# Altium PCB Power15V0_0.3A_TrLess.PcbDoc
Units mm, origin at the board's own origin, x right, y up, seen from the top; angles counter-clockwise.
Board outline 59.5 x 24.6 mm, 2 copper layers (Top Layer, Bottom Layer); 22 components, 12 nets, 53 pads, 0 vias.
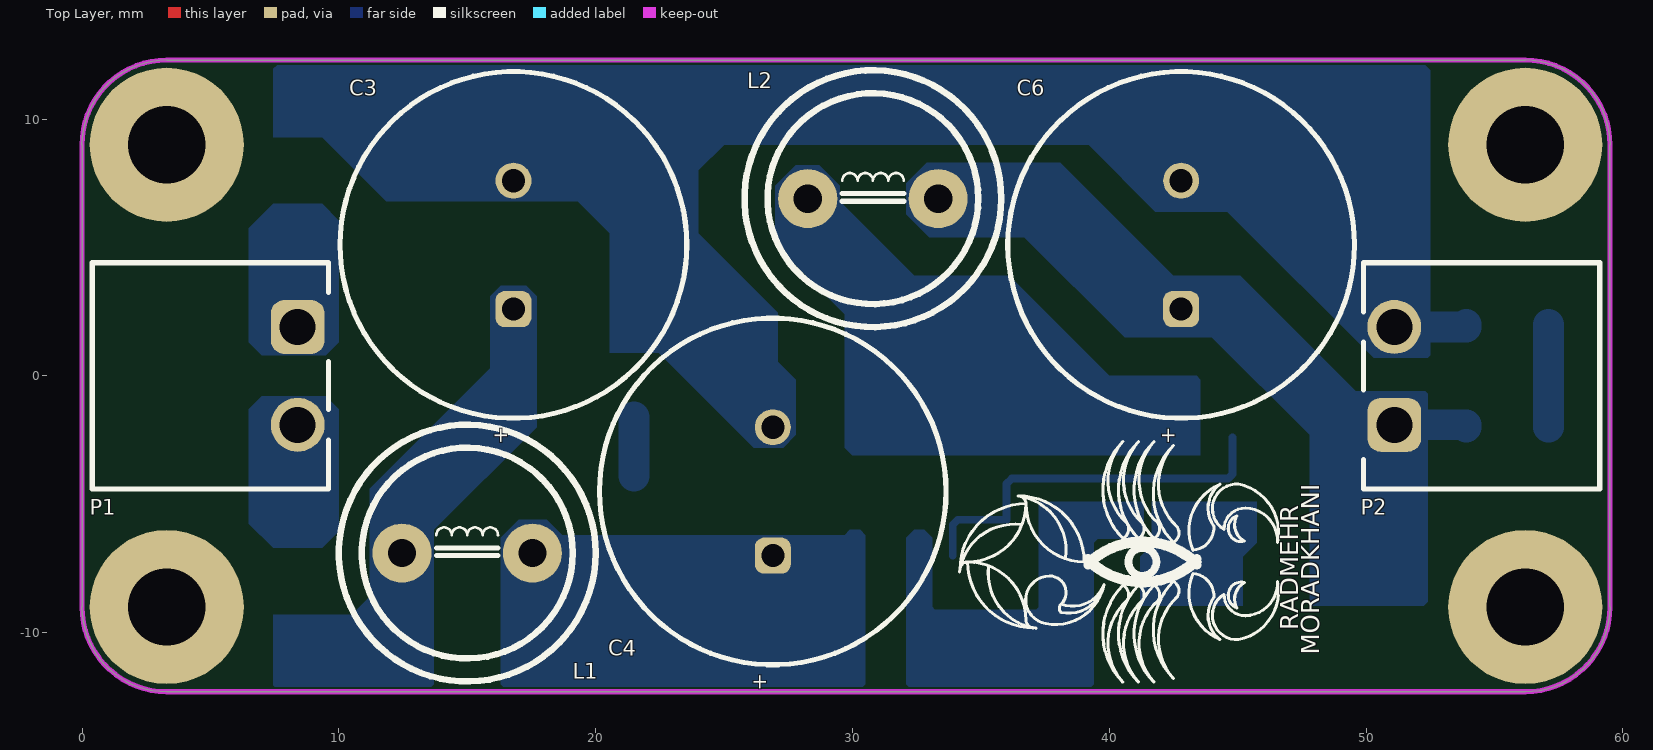
[diagram p0: Top Layer view]
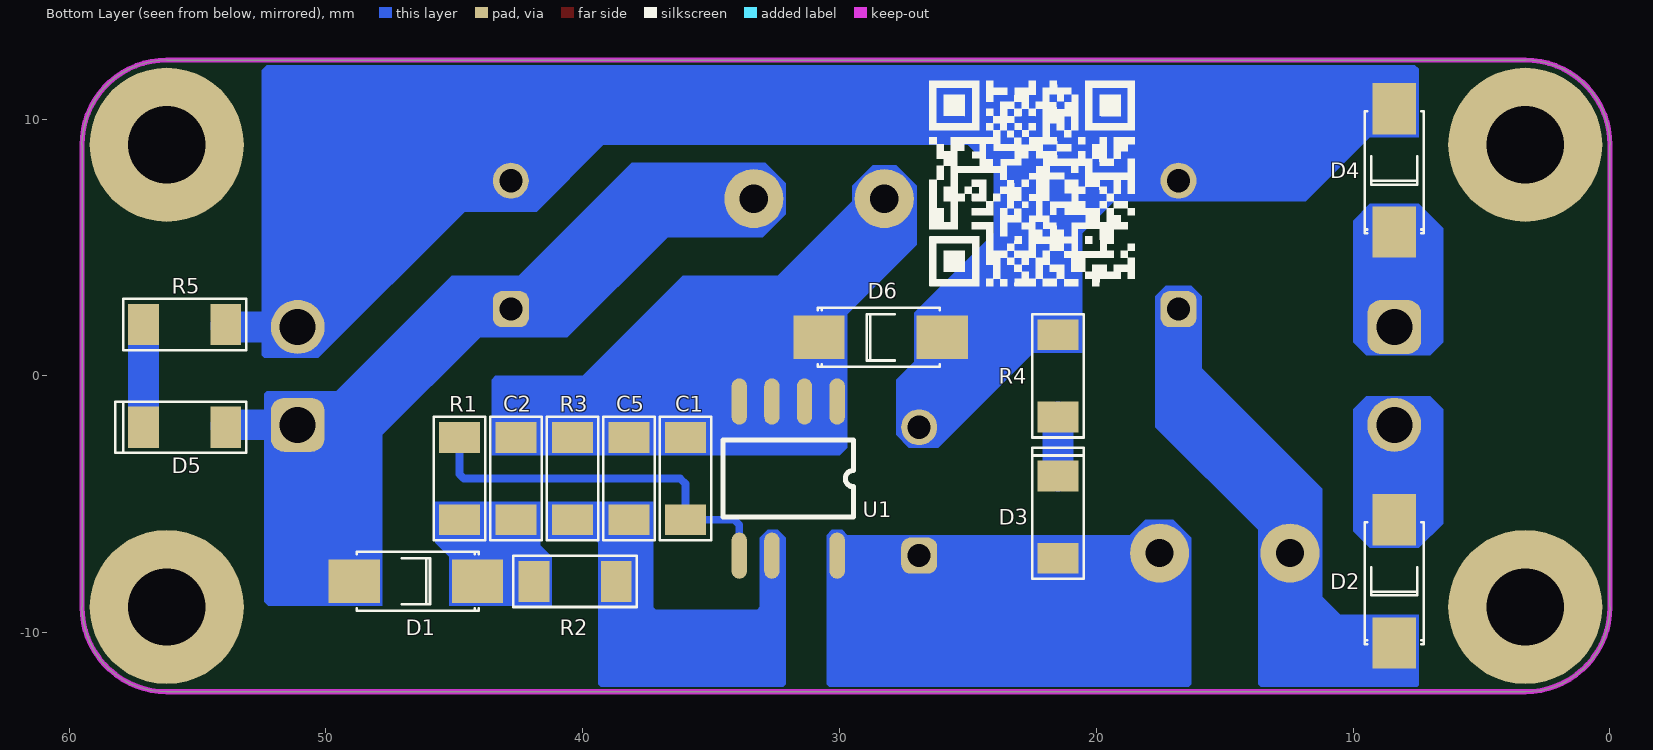
[diagram p1: Bottom Layer view, seen from below]
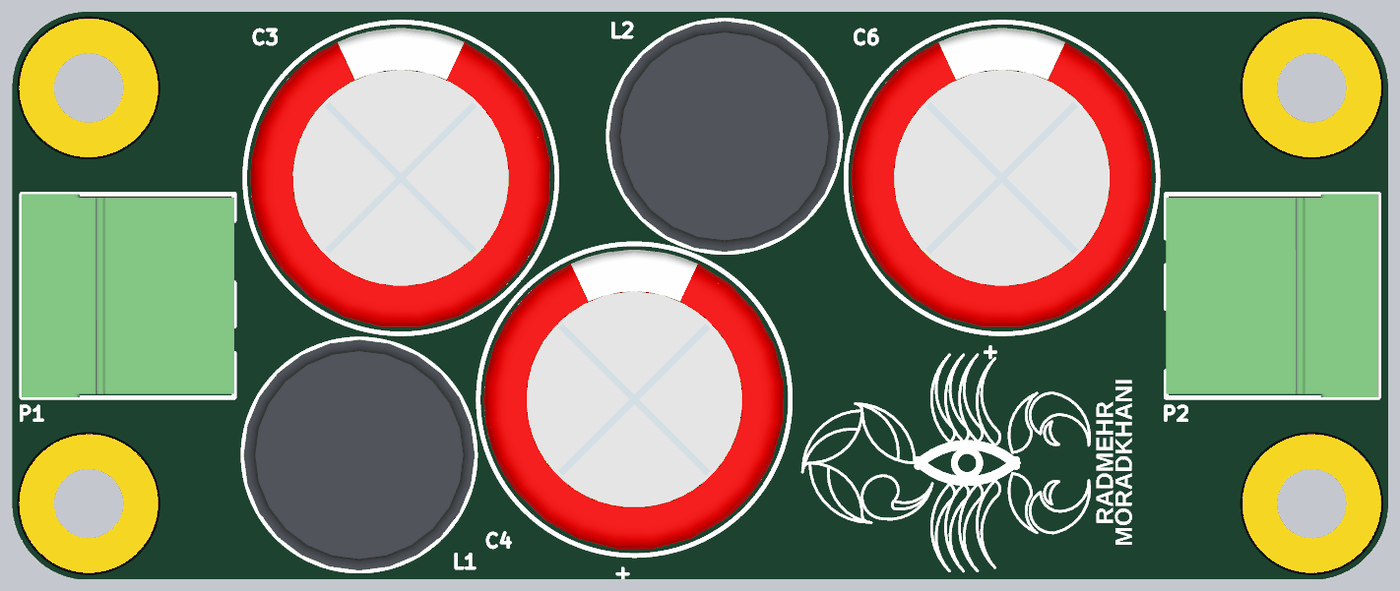
[diagram p2: 3D render of the assembled board from above, using the file's embedded part models]
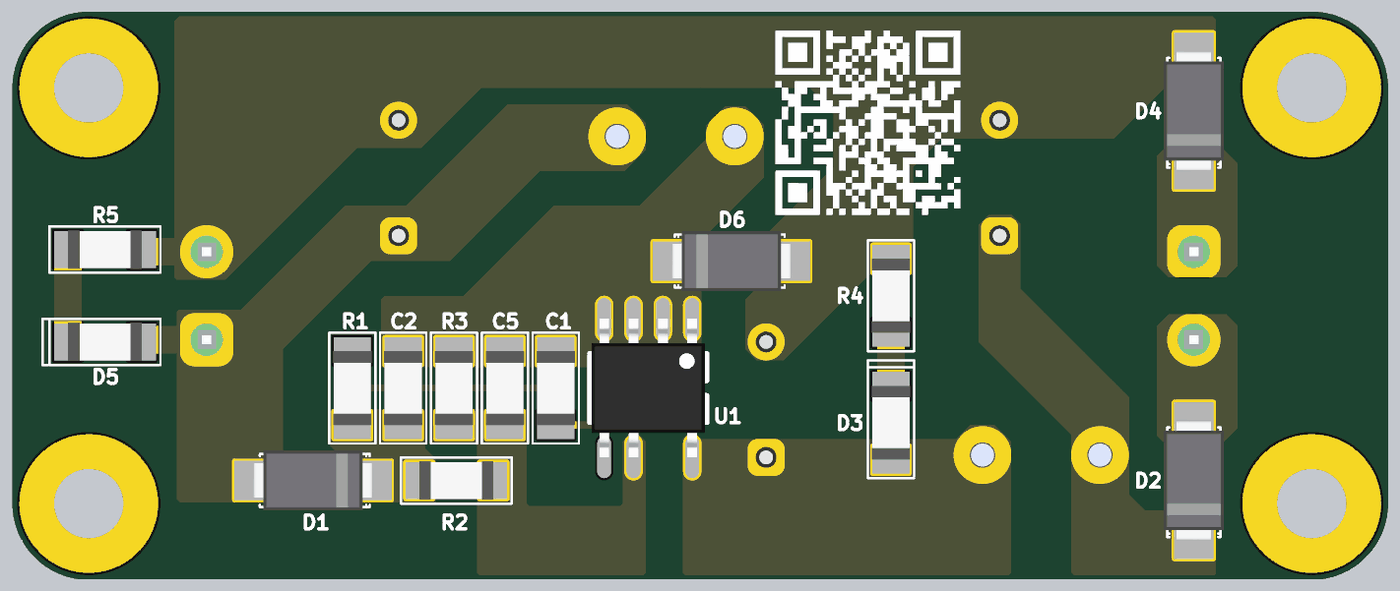
[diagram p3: 3D render of the assembled board from below, using the file's embedded part models]

## Layer stack, top to bottom
Top Solder: solder mask 0.0102, Solder Resist, Dk 3.5
Top Layer: signal copper 0.0356
Dielectric 1: dielectric 0.32, FR-4, Dk 4.8
Bottom Layer: signal copper 0.0356
Bottom Solder: solder mask 0.0102, Solder Resist, Dk 3.5

## Board outline
0,-9 0,9 -0.002,9 cw(c3.3,9) 3.3,12.302 3.3,12.3 56.2,12.3 56.2,12.302 cw(c56.2,9) 59.502,9 59.5,9 59.5,-9 59.502,-9 cw(c56.2,-9) 56.2,-12.302 56.2,-12.3 3.3,-12.3 3.3,-12.302 cw(c3.3,-9)

## Design rules (kind name [scope] priority, off if disabled: settings)
Clearance [All] p1: gap=0.5 ignorepadtopadclearanceinfootprint=FALSE except(0: Arc-Hole Track-Hole SMDPad-Hole THPad-Hole Via-Hole Fill-Hole Poly-Hole Region-Hole Text-Hole)
PlaneClearance [All] p1: clearance=0.5
PlaneConnect [All] p1: pad.planeconnectstyle=Relief pad.reliefexpansion=0.5 pad.reliefentries=4 pad.reliefconductorwidth=0.3 pad.reliefairgap=0.3 via.planeconnectstyle=Direct via.reliefexpansion=0.508 via.reliefentries=4 via.reliefconductorwidth=0.254 via.reliefairgap=0.254
PolygonConnect [All] p1: thpad.connectstyle=Relief thpad.reliefconductorwidth=0.3 thpad.reliefentries=4 thpad.polygonreliefangle="90 Angle" thpad.airgapwidth=0.5 smdpad.connectstyle=Relief smdpad.reliefconductorwidth=0.3 smdpad.reliefentries=4 smdpad.polygonreliefangle="90 Angle" smdpad.airgapwidth=0.5 via.connectstyle=Direct via.reliefconductorwidth=0.254 via.reliefentries=4 via.polygonreliefangle="90 Angle" via.airgapwidth=0.254
RoutingVias [All] p1: holewidth=0.5 width=0.8 viastyle="Through Hole" minholewidth=0.5 minwidth=0.8 maxholewidth=0.5 maxwidth=0.8
SolderMaskExpansion [All] p1: expansion=0.102 istentingtop=FALSE
Width [All] p1: maxlimit=1.2 minlimit=0.3 preferedwidth=0.6 minimp=50.000000 maximp=50.000000 favimp=50.000000
28 further rules are at their usual default settings.

## Components (designator, comment, footprint, x,y, rotation, side; value= is the part's Value field where it differs from the comment)
C1 "1u" "C 1206" 36,-4 r270 bottom
C2 "330n" "C 1206" 42.6,-4 r270 bottom
C3 "10µF" WCAP-AT1H_D13H20 16.8,5.1 r270 top
C4 "10µF" WCAP-AT1H_D13H20 26.9,-4.5 r270 top
C5 "100P" "C 1206" 38.2,-4 r270 bottom
C6 "330µF" WCAP-AT1H_D13H20 42.8,5.1 r270 top
D1 "US1M" DIOD_SMA 46.5,-8 r180 bottom
D2 "US1M" DIOD_SMA 8.4,-8 r270 bottom
D3 "LED_SMD" "D 1206" 21.5,-5.5 r90 bottom
D4 "US1M" DIOD_SMA 8.4,8 r270 bottom
D5 "LED_SMD" "D 1206" 55.5,-2 r0 bottom
D6 "US1M" DIOD_SMA 28.4,1.5 r0 bottom
L1 "1mH" L_5mm_DIP-2 15,-6.9 r0 top
L2 "1mH" L_5mm_DIP-2 30.8,6.9 r0 top
P1 "691322310002" 691322310002 5,0 r270 top
P2 "691322310002" 691322310002 54.5,0 r90 top
R1 "19K" "R 1206" 44.8,-4 r270 bottom
R2 "50K" "R 1206" 40.3,-8 r180 bottom
R3 "10K" "R 1206" 40.4,-4 r270 bottom
R4 "100K" "R 1206" 21.5,0 r270 bottom
R5 "10K" "R 1206" 55.5,2 r0 bottom
U1 "AL17150-10B" SOIC-7 32,-4 r270 bottom

## Footprints (in the part's own frame and the unit in brackets; to place one, negate y for a bottom-side part, rotate by r counter-clockwise, add the part's x,y. Pads: shape width x height; smd on the part's side, far side on the other; paste and mask are expansions set on the pad)
691322310002 [mm] "Horizontal PCB Header, pitch 3.81mm, 02p"
  rrect50% 2.1x2.1 hole 1.4: 1(-1.905,3.4)
  round 2.1 hole 1.4: 2(1.905,3.4)
  silkscreen extent -4.4,-4.6 4.41,4.6, body extent -4.4,-4.6 4.41,4.6, height 7.25
"C 1206" [mm] "C?"
  rect 1.2x1.6 smd: 1(-1.6,0) 2(1.6,0)
  Top Layer pour cut-out: -0.9,0.95 0.9,0.95 0.9,-0.95 -0.9,-0.95
  silkscreen extent -2.4,-1 2.4,1, body extent -1.6,-0.83 1.6,0.83, height 0.57
"D 1206" [mm] "D?"
  rect 1.2x1.6 smd: 1(-1.6,0) 2(1.6,0)
  Top Layer pour cut-out: -0.9,0.95 0.9,0.95 0.9,-0.95 -0.9,-0.95
  silkscreen extent -2.4,-1 2.7,1, body extent -1.6,-0.83 1.6,0.83, height 0.57
DIOD_SMA [mm] "D?"
  rect 2x1.7 smd: 1(-2.4,0) 2(2.4,0)
  Top Layer pour cut-out: -1.3,0.95 1.3,0.95 1.3,-0.95 -1.3,-0.95
  silkscreen extent -2.3,-1.15 2.45,1.15, body extent -2.6,-1.3 2.6,1.3, height 2.42
L_5mm_DIP-2 [mm] "L?"
  round 2.3 hole 1.1: 1(-2.54,0) 2(2.54,0)
  silkscreen extent -5,-5 5,5, body extent -5,-5 5,5, height 12.13
"R 1206" [mm] "R?"
  rect 1.2x1.6 smd: 1(-1.6,0) 2(1.6,0)
  Top Layer pour cut-out: -0.9,0.95 0.9,0.95 0.9,-0.95 -0.9,-0.95
  silkscreen extent -2.4,-1 2.4,1, body extent -1.6,-0.83 1.6,0.83, height 0.57
SOIC-7 [mm] "U?"
  oval 1.8x0.6 smd: 1(-3,1.905) 2(-3,0.635) 3(-3,-0.635) 4(-3,-1.905) 5(3,-1.905) 6(3,-0.635) 7(3,1.905)
  silkscreen extent -1.5,-2.54 1.5,2.54, body extent -3,-2.45 3,2.45, height 1.75
WCAP-AT1H_D13H20 [mm] "Aluminium Electrolytic Radial THD Capacitors, 13x20mm"
  rrect50% 1.4x1.4 hole 0.9: 1(2.5,0)
  round 1.4 hole 0.9: 2(-2.5,0)
  silkscreen extent -6.75,-6.75 6.75,6.75, body extent -6.49,-6.5 6.5,6.5, height 20.26

## Part data
C1 C2 C5: library part CAP_SMD, "CAP_SMD"
C3 C4: library part 860241478003, "WCAP-AT1H Aluminum Electrolytic Capacitor, Radial, THT, D13 x H20mm, 10µF, 450V", Capacitance Tolerance=+/-20%, Leakage Current=280µA, Manufacturer="Wurth Elektronik", Operating Temperature Max=105°C, Operating Temperature Min=-25°C, Rated Voltage (DC)=450V, Ripple Current=390mA, Capacitance=10µF, Category="Aluminum Electrolytic Capacitors", ComponentLink1Description="Website Link", ComponentLink1URL=https://www.we-online.com/redexpert/article/860241478003?ad, ComponentLink2Description="Datasheet Link", ComponentLink2URL=https://www.we-online.com/redexpert/spec/860241478003?ad, Diameter=13mm, Dissipation Factor=20%, Endurance=10000h, Height=20mm, Manufacturer Part Number=860241478003, Match Code=WCAP-AT1H, Mount="Through Hole", Packaging="Ammo Pack", Technical Reference=ATJI200100M450DSPACK000
C6: library part 860240578009, "WCAP-AT1H Aluminum Electrolytic Capacitor, Radial, THT, D13 x H20mm, 330µF, 35V", Capacitance Tolerance=+/-20%, Leakage Current=115.5µA, Manufacturer="Wurth Elektronik", Operating Temperature Max=105°C, Operating Temperature Min=-40°C, Rated Voltage (DC)=35V, Ripple Current=1035mA, Capacitance=330µF, Category="Aluminum Electrolytic Capacitors", ComponentLink1Description="Website Link", ComponentLink1URL=https://www.we-online.com/redexpert/article/860240578009?ad, ComponentLink2Description="Datasheet Link", ComponentLink2URL=https://www.we-online.com/redexpert/spec/860240578009?ad, Diameter=13mm, Dissipation Factor=12%, Endurance=10000h, Height=20mm, Manufacturer Part Number=860240578009, Match Code=WCAP-AT1H, Mount="Through Hole", Packaging="Ammo Pack", Technical Reference=ATDI200331M035DSPACK000
D1 D2 D4 D6: library part DIOD_SMD, "DIOD_SMD"
L1 L2: library part Inductor, "Inductor"
P1 P2: "WR-TBL Series 322 Horizontal PCB Header, Through Hole, pitch 3.81mm, 2p", Manufacturer="Wurth Elektronik", Operating Temperature Max=105°C, Operating Temperature Min=-40°C, Rated Current=10A, Working Voltage=300V, Application=Pluggable, Category="Terminal Blocks", ComponentLink1Description="Manufacturer Link", ComponentLink1URL=https://www.we-online.com/redexpert/article/691322310002?ad, ComponentLink2Description=Datasheet, ComponentLink2URL=https://www.we-online.com/redexpert/spec/691322310002?ad, Manufacturer Part Number=691322310002, Match Code=WR-TBL, Modularity=No, Mount="Through Hole", Orientation=Horizontal, Packaging=Box, PCB/Cable/Panel=PCB, Pin Number=2, Pitch=3.81mm
R1 R2 R3 R4 R5: library part RES_SMD, "RES_SMD"

## Free pads (board coordinates)
  round 6 hole 3 mask+0.1: ""(3.3,-9) ""(3.3,9) ""(56.2,-9) ""(56.2,9)

## Nets (pads, with @x,y where several pads share a name; then routed paths per layer and width w, separated by ;. In a path a pad name is that pad's centre, name@x,y a point inside that pad or via, vN(x,y) a via of type N, cw(c..) or ccw(c..) an arc to the next point about the centre after c; other vN are vias at no path point)
+8V8: C1.2 R1.1 U1.5 | length 15.2
  Bottom Layer w0.3: U1.5 33.905,-5.795 34.1,-5.6 C1.2 36,-4.2 36.2,-4 44.624,-4 44.8,-3.824 R1.1
+15V0: C6.1 D1.1 D5.1 L2.2 P2.1 | length 2.9
  Bottom Layer w1.2: P2.1 53.9,-1.905 D5.1
GND: C3.2 C4.2 C6.2 D4.1 D6.1 P2.2 R4.1 R5.1 | length 2.9
  Bottom Layer w1.2: P2.2 53.9,1.905 R5.1
NetC2_2: C2.2 D1.2 R1.2 R2.1
NetC3_1: C3.1 D2.2 L1.1
NetC4_1: C4.1 D3.1 L1.2 U1.7
NetC5_2: C5.2 R2.2 R3.2 U1.6
NetD2_1: D2.1 P1.2 | length 0
NetD3_2: D3.2 R4.2 | length 2.3
  Bottom Layer w1.2: D3.2 R4.2
NetD4_2: D4.2 P1.1 | length 0
NetD5_2: D5.2 R5.2 | length 4
  Bottom Layer w1.2: D5.2 R5.2
Source: C1.1 C2.1 C5.1 D6.2 L2.1 R3.1 U1.1 U1.2 U1.3 U1.4

## Keep-outs
Keep-Out Layer:
  lines w0.2: -0.002,-9 ccw(c3.3,-9) 3.3,-12.302 ; -0.002,9 cw(c3.3,9) 3.3,12.302 ; 0,-9 0,9 ; 3.3,-12.3 56.2,-12.3 ; 3.3,12.3 56.2,12.3 ; 56.2,-12.302 ccw(c56.2,-9) 59.502,-9 ; 56.2,12.302 cw(c56.2,9) 59.502,9 ; 59.5,-9 59.5,9

## Other copper
Bottom Layer:
  region net NetD2_1: 7,-0.8 6.5,-1.3 6.5,-5.75 7.45,-6.7 9.35,-6.7 10,-6.05 10,-1.3 9.5,-0.8
  region net NetD4_2: 7,0.8 6.5,1.3 6.5,5.75 7.45,6.7 9.35,6.7 10,6.05 10,1.3 9.5,0.8
  region net GND: 27.8,-2.3 27.8,-0.15 27.1,0.55 27.1,2.45 24,5.55 24,8 25,9 39.2,9 41.8,6.4 44.6,6.4 50.3,0.7 52.4,0.7 52.5,0.8 52.5,11.9 52.3,12.1 7.6,12.1 7.45,11.95 7.45,9.3 9.35,9.3 11.85,6.8 19.3,6.8 20.55,5.55 20.55,0.9 22.45,0.9 26.15,-2.8 27.3,-2.8
  region net NetC4_1: 17,-5.6 16.3,-6.3 16.3,-12 16.4,-12.1 30.4,-12.1 30.5,-12 30.5,-6.2 30.3,-6 29.9,-6 29.7,-6.2 18.7,-6.2 18.1,-5.6
  region net NetC2_2: 45.75,-4.9 45.75,-6.5 45.2,-7.05 45.2,-8.95 41.2,-8.95 41.2,-7.05 41.65,-6.6 41.65,-4.9
  region net NetC3_1: 7.45,-9.3 10.5,-9.3 11.2,-8.6 11.2,-4.402 15.9,0.298 15.9,3.1 16.3,3.5 17.3,3.5 17.7,3.1 17.7,-2 13.7,-6 13.7,-12 13.6,-12.1 7.5,-12.1 7.45,-12.05
  region net +15V0: 47.8,-8.95 47.8,-2.3 44,1.5 40.6,1.5 36.7,5.4 33,5.4 32.1,6.3 32.1,7.5 32.9,8.3 38.1,8.3 42.5,3.9 45.1,3.9 49.6,-0.6 52.3,-0.6 52.4,-0.7 52.4,-8.8 52.25,-8.95
  region net Source: 28.7,8.2 29.5,7.4 29.5,6.8 32.4,3.9 36.1,3.9 40,0 43.4,0 43.55,-0.15 43.55,-3.1 30,-3.1 29.7,-2.8 29.7,2.4 27,5.1 27,7.4 27.8,8.2
  region net NetC5_2: 41.35,-4.9 37.25,-4.9 37.25,-9 37.15,-9.1 33.2,-9.1 33.1,-9 33.1,-6.3 32.8,-6 32.4,-6 32.1,-6.3 32.1,-12 32.2,-12.1 39.3,-12.1 39.4,-12 39.4,-6.5 39.55,-6.35 41.35,-6.35

## Silkscreen, mask and mechanical layers (free items; w line width, h text height)
Top Overlay:
  circle w0.302: c41.292,-7.243 r0.544
  lines w0.119: 34.172,-7.638 cw(c36.304,-7.925) 36.591,-5.793 ; 35.308,-7.408 ccw(c37.439,-7.696) 37.152,-9.827 ; 36.757,-9.51 ccw(c34.489,-9.51) 34.489,-7.243 ; 36.757,-9.51 ccw(c37.059,-9.51) 37.059,-9.812 cw(c37.059,-7.243) 34.489,-7.243 ; 38.131,-8.887 ccw(c38.585,-7.678) 39.794,-8.131 ; 38.299,-7.091 ccw(c36.167,-6.804) 36.454,-4.673 ; 34.489,-7.243 ccw(c34.489,-7.545) 34.187,-7.545 cw(c36.757,-7.545) 36.757,-4.975 ; 34.489,-7.243 ccw(c34.489,-4.975) 36.757,-4.975 ; 36.454,-4.673 cw(c36.454,-7.243) 39.024,-7.243 ; 36.454,-4.673 cw(c36.454,-4.975) 36.757,-4.975 ; 36.757,-4.975 ccw(c39.024,-4.975) 39.024,-7.243 ; 39.024,-7.243 cw(c41.292,-9.51) 43.56,-7.243 cw(c41.292,-4.975) 39.024,-7.243 ; 39.794,-8.131 cw(c38.417,-7.831) 38.117,-9.208 cw(c38.285,-9.052) 38.129,-8.885 ccw(c37.683,-8.43) 37.672,-7.793 ccw(c37.68,-8.724) 37.527,-9.643 ccw(c37.904,-7.753) 39.794,-8.131 ; 40.536,-11.929 cw(c42.426,-10.039) 40.536,-8.15 cw(c40.309,-8.528) 40.687,-8.754 ccw(c42.199,-10.417) 40.536,-11.929 ; 40.536,-6.336 ccw(c40.309,-5.958) 40.687,-5.731 cw(c42.199,-4.068) 40.536,-2.556 ccw(c42.426,-4.446) 40.536,-6.336 ; 41.141,-11.929 cw(c43.03,-10.039) 41.141,-8.15 cw(c40.914,-8.528) 41.292,-8.754 ccw(c42.804,-10.417) 41.141,-11.929 ; 41.141,-6.336 ccw(c40.914,-5.958) 41.292,-5.731 cw(c42.804,-4.068) 41.141,-2.556 ccw(c43.03,-4.446) 41.141,-6.336 ; 41.745,-11.929 cw(c43.635,-10.039) 41.745,-8.15 cw(c41.519,-8.528) 41.897,-8.754 ccw(c43.408,-10.417) 41.745,-11.929 ; 41.745,-6.336 ccw(c41.519,-5.958) 41.897,-5.731 cw(c43.408,-4.068) 41.745,-2.556 ccw(c43.635,-4.446) 41.745,-6.336 ; 42.501,-11.778 cw(c44.391,-9.888) 42.501,-7.998 cw(c42.275,-8.376) 42.652,-8.603 ccw(c44.164,-10.266) 42.501,-11.778 ; 42.501,-6.487 ccw(c42.275,-6.109) 42.652,-5.882 cw(c44.164,-4.219) 42.501,-2.707 ccw(c44.391,-4.597) 42.501,-6.487 ; 43.257,-7.696 ccw(c45.071,-8.452) 44.315,-10.266 cw(c45.011,-9.329) 44.074,-8.633 ccw(c43.197,-8.573) 43.257,-7.696 ; 43.257,-6.789 ccw(c43.197,-5.912) 44.074,-5.852 cw(c45.011,-5.156) 44.315,-4.219 ccw(c45.071,-6.033) 43.257,-6.789 ; 44.466,-8.505 ccw(c45.305,-8.501) 45.309,-9.341 ccw(c45.265,-8.05) 46.556,-8.006 cw(c44.666,-8.38) 45.04,-10.27 cw(c44.972,-9.317) 44.466,-8.505 ; 44.466,-5.98 cw(c44.972,-5.169) 45.04,-4.215 cw(c44.666,-6.105) 46.556,-6.479 ccw(c45.265,-6.436) 45.309,-5.145 ccw(c45.305,-5.984) 44.466,-5.98 ; 44.666,-8.38 ccw(c45.141,-8.556) 44.965,-9.031 cw(c45.606,-8.691) 45.265,-8.05 ccw(c45.13,-8.515) 44.666,-8.38 ; 44.666,-6.105 ccw(c45.13,-5.971) 45.265,-6.436 cw(c45.606,-5.795) 44.965,-5.454 ccw(c45.141,-5.929) 44.666,-6.105
  lines w0.357: 39.176,-7.364 cw(c41.292,-9.48) 43.408,-7.364 ; 39.176,-7.122 ccw(c41.292,-5.005) 43.408,-7.122
  text "RADMEHR" at 47.601,-9.912 h1.19 r90
  text "MORADKHANI" at 48.42,-10.853 h1.19 r90
Bottom Overlay:
  drawing of 22 lines, arcs and shapes, not listed

## Text inside footprints (layer, text, board x,y; h text height)
C3: Top Overlay "+" at 16.063,-1.975 h0.6 r270
C4: Top Overlay "+" at 26.163,-11.575 h0.6 r270
C6: Top Overlay "+" at 42.063,-1.975 h0.6 r270